# Altium PCB hyb.PcbDoc
Units mm, origin at the board's own origin, x right, y up, seen from the top; angles counter-clockwise.
Board outline 25.4 x 31.75 mm, 4 copper layers (L1, L2, L3, L4), stack 1.641 mm thick; 4 components, 4 nets, 132 pads, 38 vias.
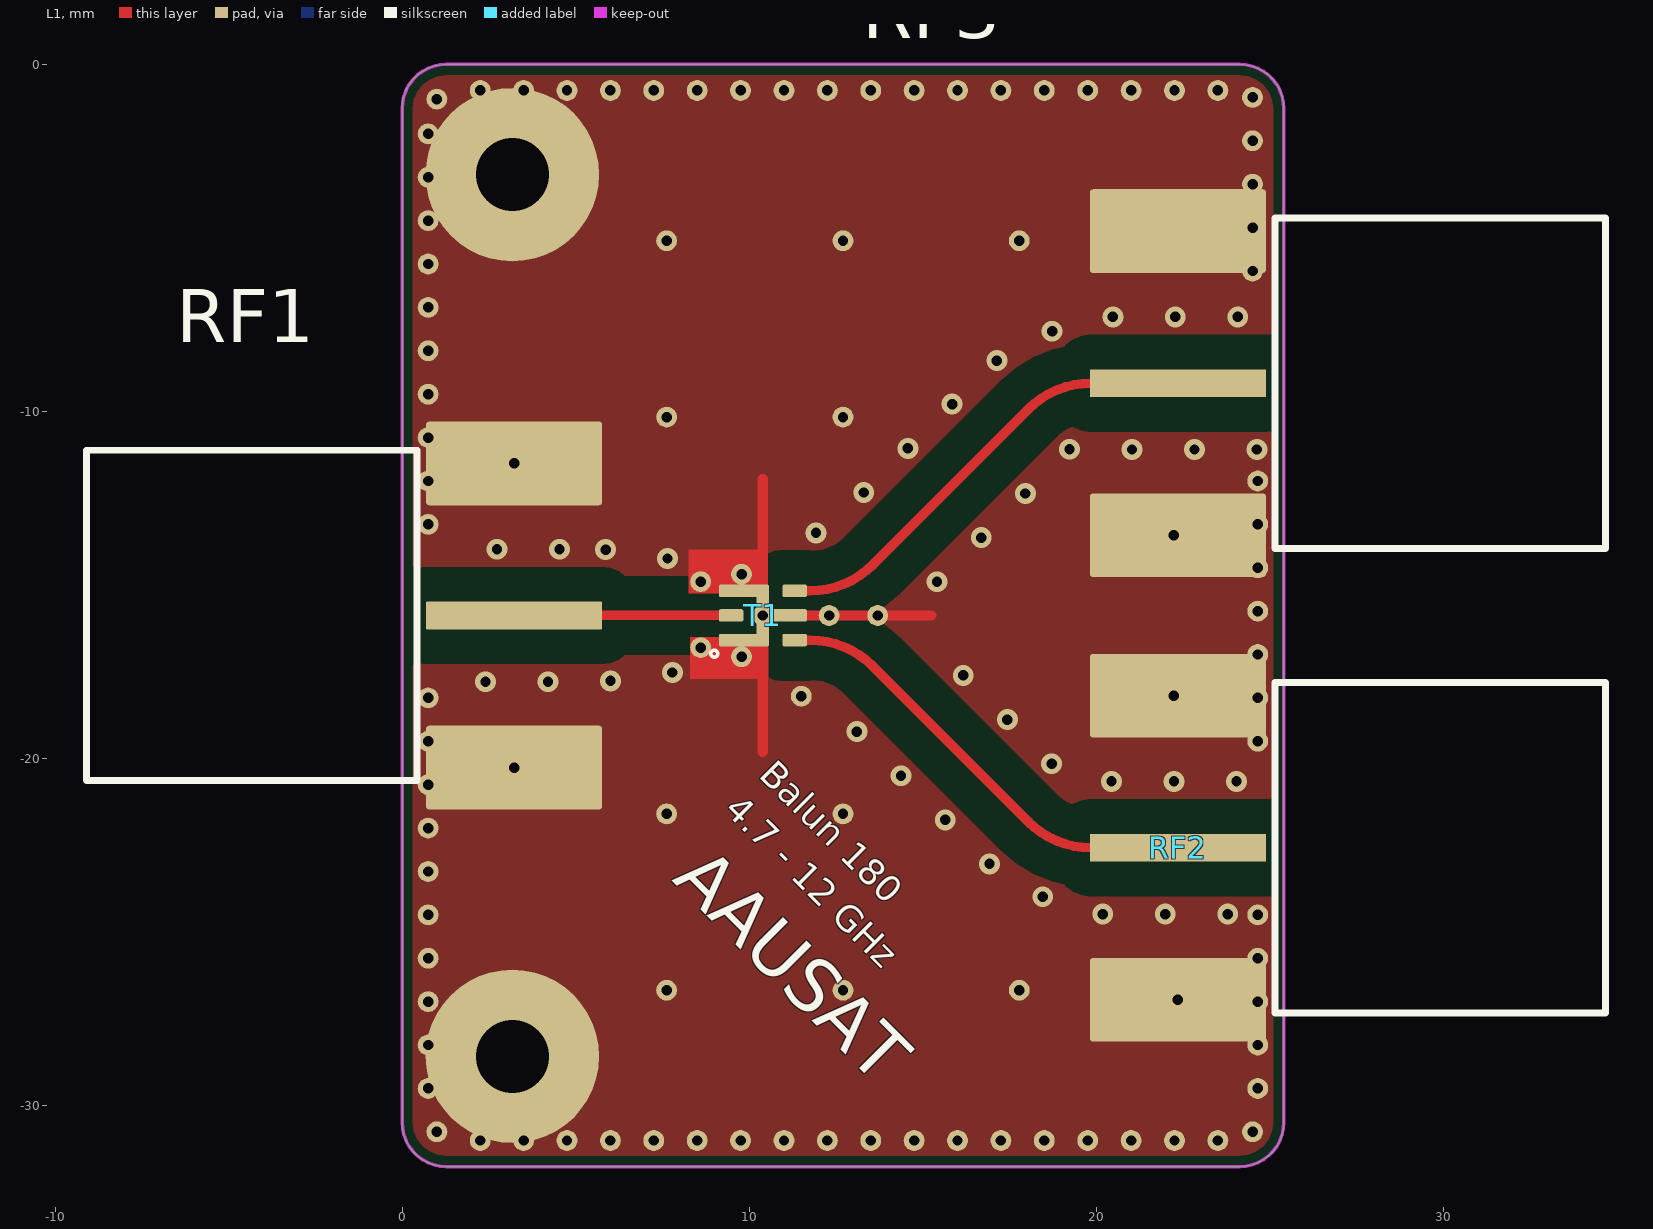
[diagram p0: L1 view]
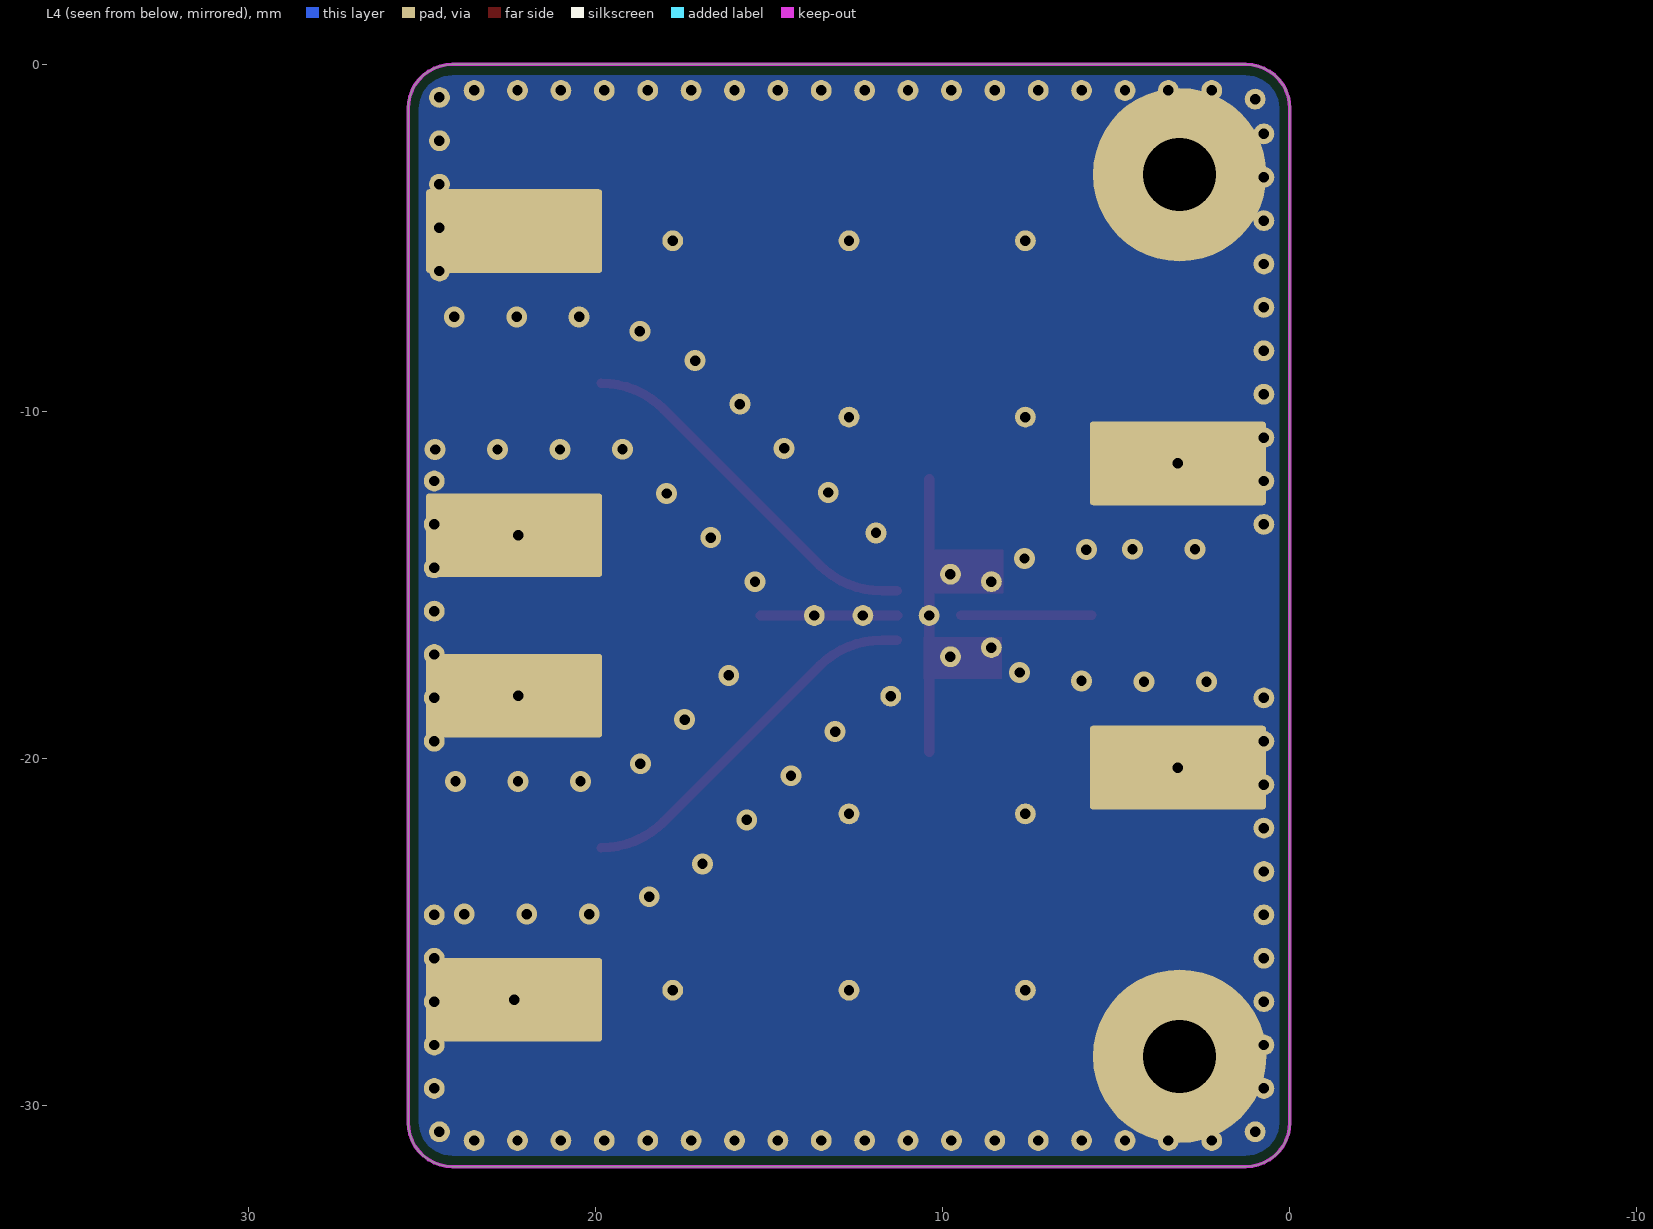
[diagram p1: L4 view, seen from below]
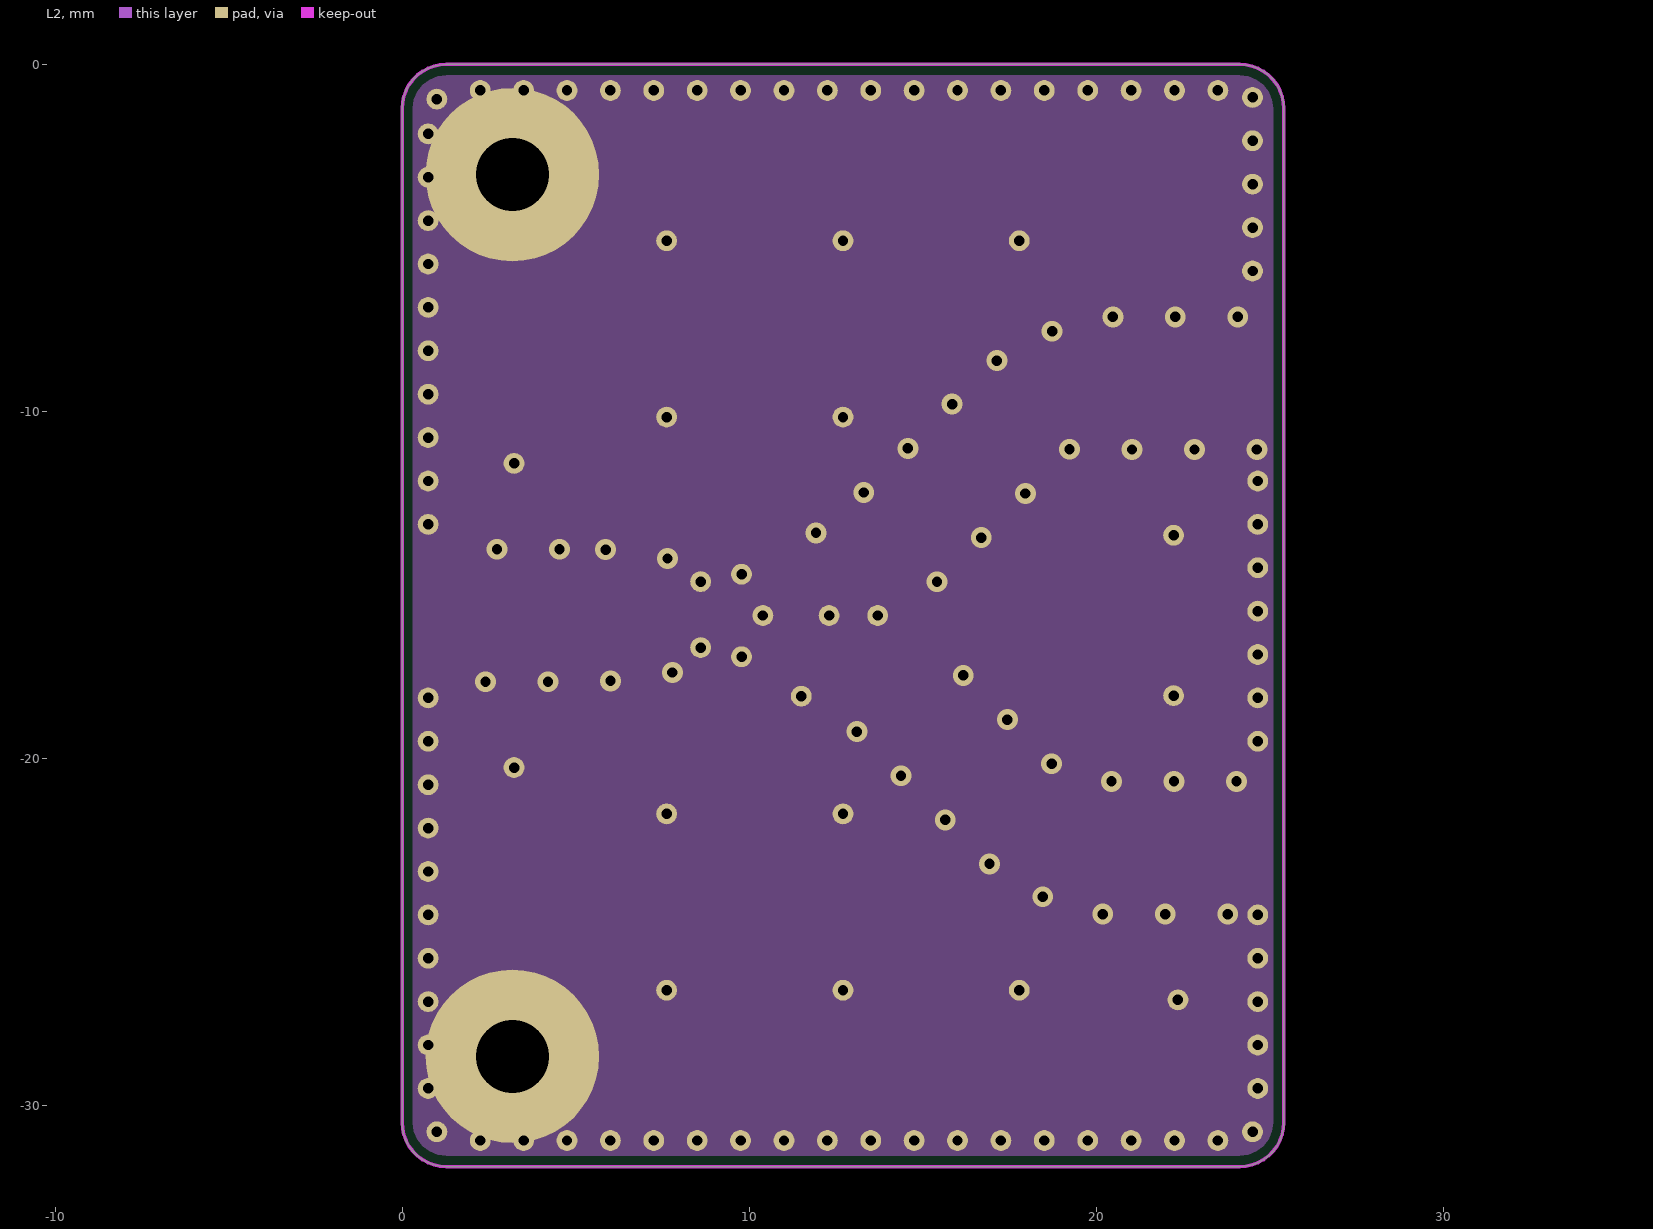
[diagram p2: L2]
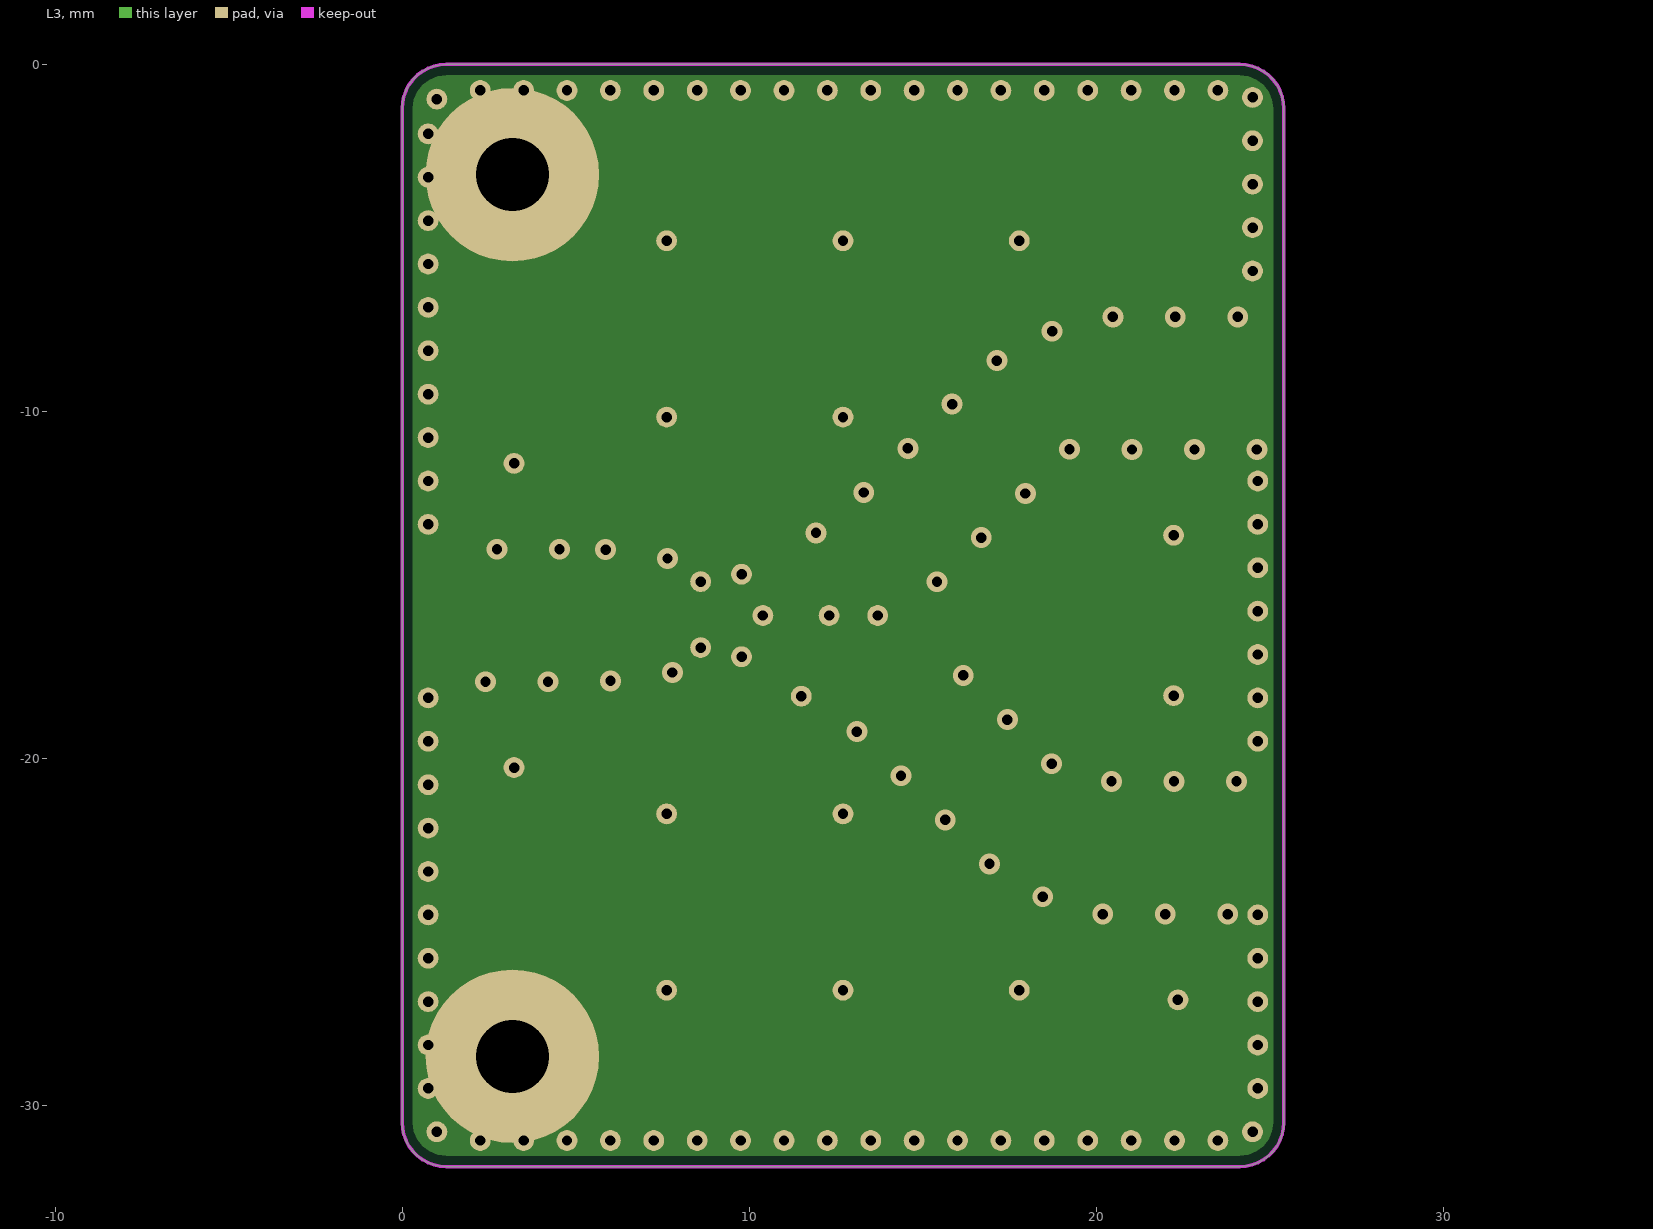
[diagram p3: L3]

## Layer stack, top to bottom
Top Solder: solder mask 0.0254, Solder Resist, Dk 3.5
L1: signal copper 0.0356
Dielectric 1: prepreg 0.1702, FR408, Dk 4.65
L2: signal copper 0.0178
Dielectric 3: core 1.1938, Dk 4.65
L3: signal copper 0.0178
Dielectric 2: prepreg 0.1702, FR408, Dk 4.65
L4: signal copper 0.0356
Bottom Solder: solder mask 0.0254, Solder Resist, Dk 3.5

## Board outline
0,-30.48 0,-1.27 cw(c1.27,-1.27) 1.27,0 24.13,0 cw(c24.13,-1.27) 25.4,-1.27 25.4,-30.48 cw(c24.13,-30.48) 24.13,-31.75 1.27,-31.75 cw(c1.27,-30.48)

## Design rules (kind name [scope] priority, off if disabled: settings)
Clearance "polygon clearance" [inPolygon vs OnLayer('L1')] p1: gap=1 ignorepadtopadclearanceinfootprint=FALSE
Clearance Clearance_1 [All] p2: gap=0.254 ignorepadtopadclearanceinfootprint=FALSE except(0: Arc-Hole Track-Hole SMDPad-Hole THPad-Hole Via-Hole Fill-Hole Poly-Hole Region-Hole Text-Hole)
DiffPairsRouting DiffPair_Diff150DiffPairsRouting [InDifferentialPairClass('DIFF50')] p1: maxlimit=2539.975 minlimit=1.016 mostfreqgap=1.016 toplayer_minwidth=0.443 toplayer_maxwidth=0.443 toplayer_prefwidth=0.443 midlayer1_minwidth=0.443 midlayer1_maxwidth=0.443 midlayer1_prefwidth=0.443 midlayer2_minwidth=0.443 midlayer2_maxwidth=0.443 midlayer2_prefwidth=0.443 bottomlayer_minwidth=0.443 bottomlayer_maxwidth=0.443 bottomlayer_prefwidth=0.443 maxuncoupledlength=12.7
DiffPairsRouting [All] p2: maxlimit=0.254 minlimit=0.254 mostfreqgap=0.254 toplayer_minwidth=0.1 toplayer_maxwidth=0.381 toplayer_prefwidth=0.381 midlayer1_minwidth=0.1 midlayer1_maxwidth=0.381 midlayer1_prefwidth=0.381 midlayer2_minwidth=0.1 midlayer2_maxwidth=0.381 midlayer2_prefwidth=0.381 bottomlayer_minwidth=0.1 bottomlayer_maxwidth=0.381 bottomlayer_prefwidth=0.381 maxuncoupledlength=12.7
MatchedLengths DiffPair_Diff150MatchedLengths [InDifferentialPairClass('DIFF50')] p1: tolerance=0 checknetsindiffpair=FALSE checkdiffpairvsdiffpair=TRUE checkxsignals=TRUE checkothers=TRUE
PolygonConnect [All] p1: connectstyle=Direct reliefconductorwidth=0.254 reliefentries=4 polygonreliefangle="90 Angle" airgapwidth=0.254
RoutingVias [All] p1: holewidth=0.711 width=1.27 viastyle="Through Hole" minholewidth=0.711 minwidth=1.27 maxholewidth=0.711 maxwidth=1.27
SolderMaskExpansion [All] p1: expansion=0.102
Width [All] p1: maxlimit=0.3 minlimit=0.1 preferedwidth=0.249
29 further rules are at their usual default settings.

## Classes and differential pairs
differential pair class DIFF50: RF

## Components (designator, comment, footprint, x,y, rotation, side; value= is the part's Value field where it differs from the comment)
RF1 "SMA Coaxial 50 ohm" "SMA COAXIAL 50 OHM" 3.225,-15.875 r90 top
RF2 "SMA Coaxial 50 ohm" "SMA COAXIAL 50 OHM" 22.35,-22.567 r270 top
RF3 "SMA Coaxial 50 ohm" "SMA COAXIAL 50 OHM" 22.35,-9.183 r270 top
T1 "NCR2-113" NCR2-Series 10.393,-15.875 r90 top

## Footprints (in the part's own frame and the unit in brackets; to place one, negate y for a bottom-side part, rotate by r counter-clockwise, add the part's x,y. Pads: shape width x height; smd on the part's side, far side on the other; paste and mask are expansions set on the pad)
NCR2-Series [mm]
  rrect30% 0.36x0.71 smd: 1(-0.71,0.915) 1(-0.71,0.4) 1(0,-0.4) 1(0,-0.915) 1(0.71,0.915) 1(0.71,0.4) 2(0,0.915) 4(0.71,-0.915) 6(-0.71,-0.915)
  rrect30% 1.78x0.36 smd: 1(0,0)
  silkscreen extent -1.2,1.3 -1,1.5, body extent -1,-1.25 1,1.25, height 0.89
"SMA COAXIAL 50 OHM" [mil] "142-0701-801"
  rrect8% 31.5x200 smd: 1(0,0)
  rrect8% 95x200 smd: 2(-172.5,0) 2(172.5,0)
  rrect8% 95x200 smd far side: 2(-172.5,0) 2(172.5,0)
  silkscreen extent -187,110 187,485, body extent -187,-87 187,485, height 157

## Part data
RF1 RF2 RF3: "142-0701-801"
T1: "3.5-11 GHz balun (180), smd", PartNumber=NCR2-113+

## Free pads (board coordinates)
  round 0.6 hole 0.3: 14(8.6,-16.8) 14(8.6,-14.9) 14(9.779,-17.064) 14(9.779,-14.686) 14(10.393,-15.875) 14(11.5,-18.2) 14(12.3,-15.875) 14(13.7,-15.875) 16(1,-30.75) 16(1,-1) 16(24.5,-30.75) 17(0.75,-29.5) 17(2.25,-31) 17(2.25,-0.75) 17(24.65,-29.5) 18(0.75,-28.25) 18(3.5,-31) 18(3.5,-0.75) 18(24.65,-28.25) 18(24.65,-28.25) 19(0.75,-27) 19(4.75,-31) 19(4.75,-0.75) 19(24.65,-27) 19(24.65,-27) 20(0.75,-25.75) 20(6,-31) 20(6,-0.75) 20(24.65,-25.75) 20(24.65,-25.75) 21(0.75,-24.5) 21(7.25,-31) 21(7.25,-0.75) 21(24.65,-24.5) 22(0.75,-23.25) 22(8.5,-31) 22(8.5,-0.75) 23(0.75,-22) 23(9.75,-31) 23(9.75,-0.75) 24(0.75,-20.75) 24(11,-31) 24(11,-0.75) 25(0.75,-19.5) 25(12.25,-31) 25(12.25,-0.75) 25(24.65,-19.5) 26(0.75,-18.25) 26(13.5,-31) 26(13.5,-0.75) 26(24.65,-18.25) 26(24.65,-14.5) 27(14.75,-31) 27(14.75,-0.75) 27(24.65,-17) 27(24.65,-13.25) 28(16,-31) 28(16,-0.75) 28(24.65,-15.75) 29(17.25,-31) 29(17.25,-0.75) 30(0.75,-13.25) 30(0.75,-8.25) 30(18.5,-31) 30(18.5,-0.75) 31(0.75,-12) 31(0.75,-7) 31(19.75,-31) 31(19.75,-0.75) 31(24.5,-4.7) 31(24.65,-12) 32(0.75,-10.75) 32(0.75,-5.75) 32(21,-31) 32(21,-0.75) 33(0.75,-9.5) 33(0.75,-4.5) 33(22.25,-31) 33(22.25,-0.75) 33(24.5,-4.7) 33(24.5,-2.2) 34(0.75,-8.25) 34(0.75,-3.25) 34(0.75,-2) 34(23.5,-31) 34(23.5,-0.75) 34(24.5,-5.95) 34(24.5,-3.45) 34(24.5,-0.95) 35(24.5,-30.75) 36(3.225,-11.493) 37(3.225,-20.256) 38(22.35,-26.948) 39(22.225,-18.185) 40(22.225,-13.565) 41(7.62,-26.67) 41(7.62,-5.08) 42(12.7,-26.67) 42(12.7,-5.08) 43(7.62,-21.59) 43(7.62,-10.16) 44(12.7,-21.59) 44(12.7,-10.16) 45(17.78,-26.67) 45(17.78,-5.08)
  round 5 hole 2.1: 16(3.175,-28.575) 16(3.175,-3.175)

## Via types
v1: diameter 0.6, hole 0.3, L1 to L4, 38 vias

## Nets (pads, with @x,y where several pads share a name; then routed paths per layer and width w, separated by ;. In a path a pad name is that pad's centre, name@x,y a point inside that pad or via, vN(x,y) a via of type N, cw(c..) or ccw(c..) an arc to the next point about the centre after c; other vN are vias at no path point)
GND: pad.14 pad.16 pad.17 pad.18 pad.19 pad.20 pad.21 pad.22 pad.23 pad.24 pad.25 pad.26 pad.27 pad.28 pad.29 pad.30 pad.31 pad.32 pad.33 pad.34 pad.35 pad.36 pad.37 pad.38 pad.39 pad.40 pad.41 pad.42 pad.43 pad.44 pad.45 RF1.2 RF2.2 RF3.2 T1.1 | length 12.5
  L1 w0.3: 10.393,-19.807 10.393,-15.875 10.393,-11.943 ; T1.1@11.308,-15.875 12.3,-15.875 13.7,-15.875 15.24,-15.875
  L1 w0.443: RF2.2@22.043,-27.075 ccw(c22.043,-26.641) pad.38 ; RF3.2@22.043,-4.675 cw(c22.043,-5.109) RF3.2@22.35,-4.802
  other v1: 20.183,-24.476 21.983,-24.476 23.783,-24.476 18.454,-23.979 16.922,-23.033 15.645,-21.765 20.437,-20.657 22.237,-20.657 24.037,-20.657 14.372,-20.492 18.711,-20.146 13.1,-19.219 17.438,-18.873 2.403,-17.785 4.203,-17.785 6.003,-17.758 16.165,-17.601 7.787,-17.517 15.409,-14.906 7.645,-14.233 2.733,-13.965 4.533,-13.965 5.863,-13.978 16.682,-13.633 11.923,-13.495 17.954,-12.36 13.298,-12.333 21.026,-11.093 22.826,-11.093 24.626,-11.093 19.226,-11.086 14.57,-11.06 15.843,-9.787 17.134,-8.533 18.723,-7.688 20.475,-7.274 22.275,-7.274 24.075,-7.274
NetRF1_1: RF1.1 T1.2 | length 3.8
  L1 w0.275: RF1.1@5.715,-15.875 T1.2
RF_N: RF2.1 T1.6 | length 10.8
  L1 w0.275: T1.6 11.756,-16.585 cw(c11.756,-19.125) 13.552,-17.329 18.045,-21.823 ccw(c19.841,-20.026) RF2.1@19.841,-22.567
RF_P: RF3.1 T1.4 | length 10.8
  L1 w0.275: T1.4 11.756,-15.165 ccw(c11.756,-12.625) 13.552,-14.421 18.045,-9.927 cw(c19.841,-11.724) RF3.1@19.841,-9.183

## Polygon pours and split planes (outlines as drawn)
GND on L4 "gnd" (solid, pour order 2): 0,0 25.4,0 25.4,-31.75 0,-31.75
GND on L1 "gnd" (solid, pour order 4): 0,0 25.4,0 25.4,-31.75 0,-31.75
GND on L2 "gnd" (solid, pour order 8): 0,0 25.4,0 25.4,-31.75 0,-31.75
GND on L3 "gnd" (solid, pour order 10): 0,0 25.4,0 25.4,-31.75 0,-31.75

## Keep-outs
Keep-Out Layer:
  the board outline again, w0.1

## Other copper
L1:
  rectangle net GND: 8.3,-17.7 10.554,-16.5
  rectangle net GND: 8.255,-15.24 10.393,-13.97

## Silkscreen, mask and mechanical layers (free items; w line width, h text height)
Top Overlay:
  text "Balun 180" at 10.25,-20.5 h0.76 r315
  text "4.7 - 12 GHz" at 9.25,-21.5 h0.76 r315
  text "AAUSAT" at 7.75,-23.5 h1.52 r315
Top Solder:
  rectangle: 1.27,-1.27 25.4,0
  rectangle: 1.27,-31.75 25.4,-30.48
  rectangle: 24.13,-31.75 25.4,0
  rectangle: 0,-31.75 1.27,0
  rectangle: 13,-17.8 15.1,-13.3
  rectangle: 19.575,-24.825 25.2,-20.25
  rectangle: 19.6,-11.475 25.2,-6.925
  rectangle: 0.375,-18.1 6.509,-13.625
  rectangle: 14.925,-17.925 17.05,-13.1
  region: 13.748,-14.001 12.85,-12.075 8.477,-14.114 9.375,-16.04
  region: 9.375,-15.71 8.477,-17.636 12.85,-19.675 13.748,-17.749
  lines w0.8: 0.87,-29.61 ccw(c2.14,-29.61) 2.14,-30.88 ; 0.87,-2.14 cw(c2.14,-2.14) 2.14,-0.87 ; 23.26,-30.88 ccw(c23.26,-29.61) 24.53,-29.61 ; 23.26,-0.87 cw(c23.26,-2.14) 24.53,-2.14
  lines w3: 11.308,-16.585 cw(c11.308,-18.594) 12.729,-17.174 ; 11.308,-15.165 ccw(c11.308,-13.156) 12.729,-14.576 ; 12.729,-17.174 12.729,-17.174
  lines w4.5: 5.875,-15.875 9.478,-15.875 ; 11.756,-16.585 cw(c11.756,-19.125) 13.552,-17.329 18.045,-21.823 ccw(c19.841,-20.026) 19.841,-22.567 ; 11.756,-15.165 ccw(c11.756,-12.625) 13.552,-14.421 18.045,-9.927 cw(c19.841,-11.724) 19.841,-9.183
Bottom Solder:
  rectangle: 1.27,-1.27 25.4,0
  rectangle: 1.27,-31.75 25.4,-30.48
  rectangle: 24.13,-31.75 25.4,0
  rectangle: 0,-31.75 1.27,0
  lines w0.8: 0.87,-2.14 cw(c2.14,-2.14) 2.14,-0.87 ; 23.26,-30.88 ccw(c23.26,-29.61) 24.53,-29.61 ; 23.26,-0.87 cw(c23.26,-2.14) 24.53,-2.14